# Altium PCB Street_light_driver_90w.PcbDoc
Units mm, origin at the board's own origin, x right, y up, seen from the top; angles counter-clockwise.
Board outline 55.01 x 124 mm, 2 copper layers (Top Layer, Bottom Layer); 52 components, 24 nets, 135 pads, 0 vias.
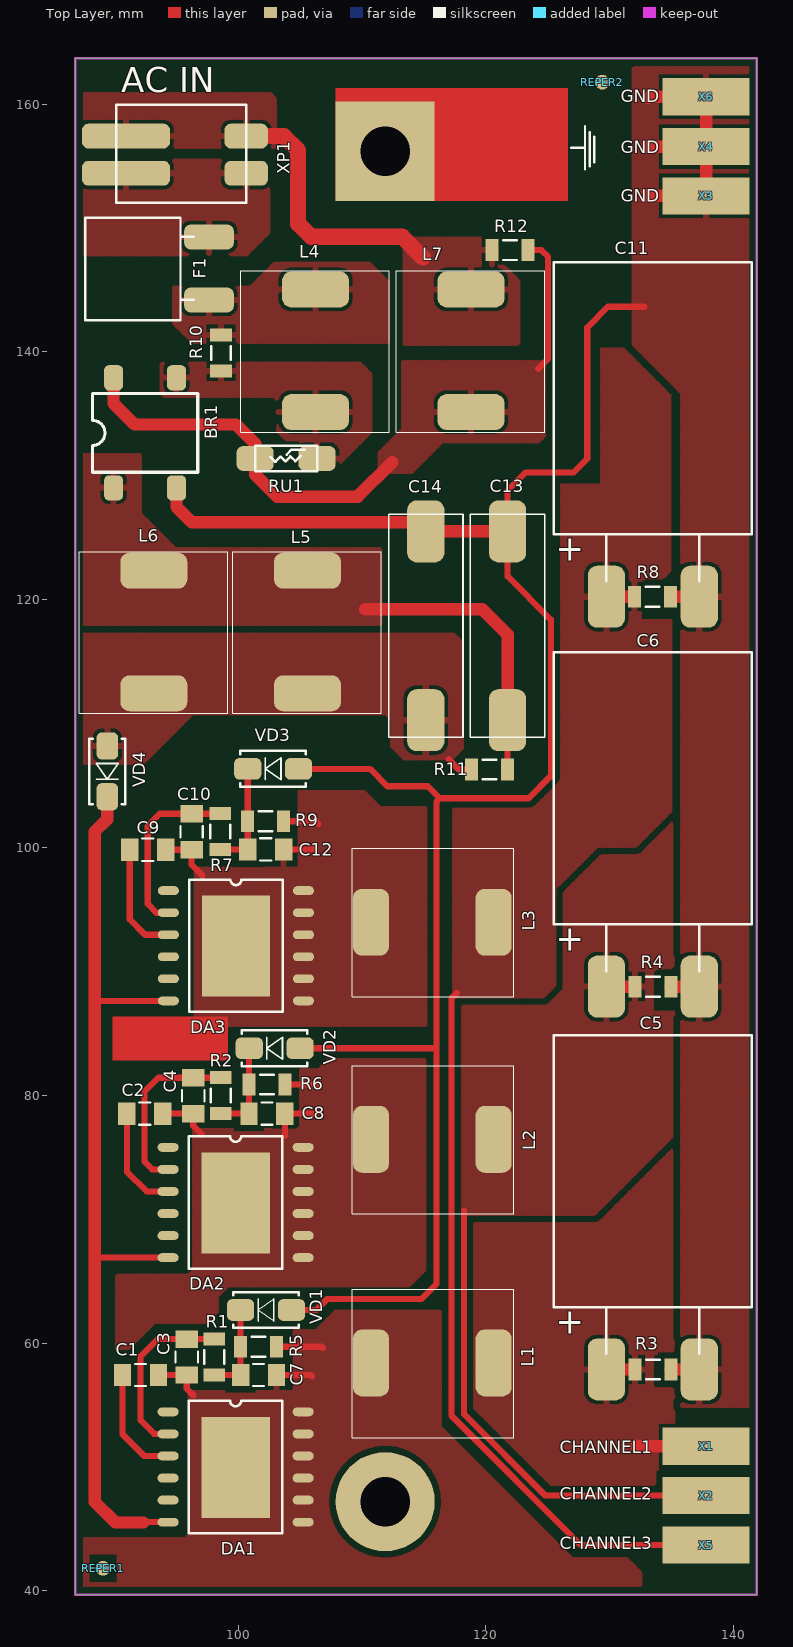
[diagram p0: Top Layer view]
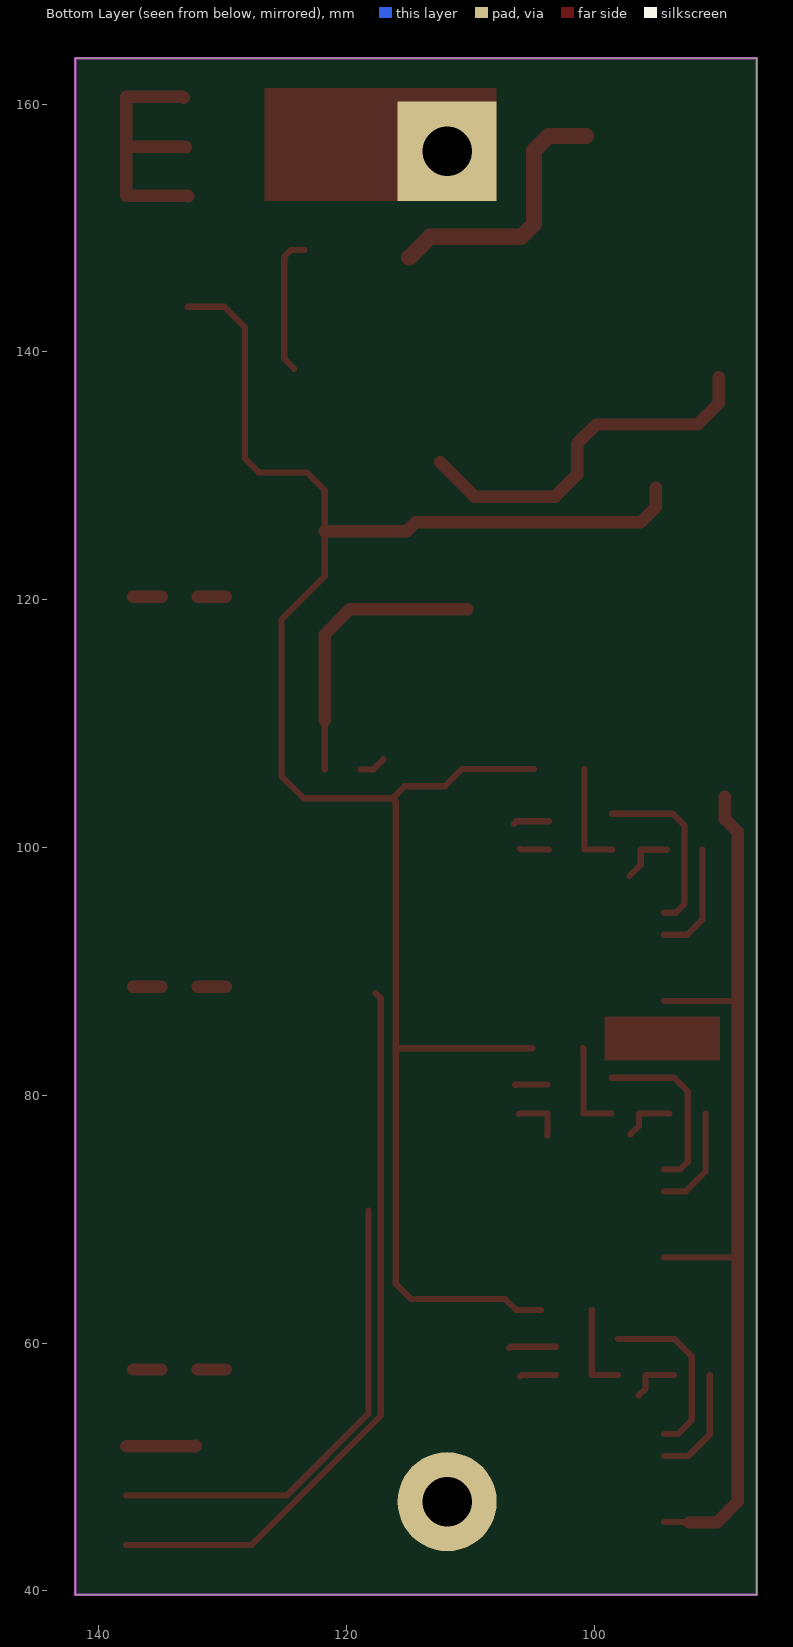
[diagram p1: Bottom Layer view, seen from below]

## Layer stack, top to bottom
Top Solder: solder mask 0.0102, Solder Resist, Dk 3.5
Top Layer: signal copper 0.0356
Dielectric 1: dielectric 0.32, FR-4, Dk 4.8
Bottom Layer: signal copper 0.0356
Bottom Solder: solder mask 0.0102, Solder Resist, Dk 3.5

## Board outline
86.868,39.703 86.868,163.703 141.875,163.703 141.875,39.703

## Design rules (kind name [scope] priority, off if disabled: settings)
Clearance [All] p1: gap=0.5
ComponentClearance [All] p1: gap=0.2 collisioncheckmode=3 verticalgap=2540 showdistances=FALSE
PolygonConnect PolygonConnect_1 [InComponent('DA1') AND InNet('NetC1_1') OR InComponent('DA2') AND InNet('NetC2_1') OR  InComponent('DA3') AND InNet('NetC9_1') OR InComponent('L1') OR InComponent('L2') OR InComponent('L3') OR InComponent('L5') OR InComponent('L6')] p1: connectstyle=Direct reliefconductorwidth=0.254 reliefentries=4 polygonreliefangle="90 Angle" airgapwidth=0.254
PolygonConnect [All] p2: connectstyle=Relief reliefconductorwidth=0.5 reliefentries=4 polygonreliefangle="90 Angle" airgapwidth=0.3
RoutingVias [All] p1: holewidth=0.711 width=1.27 viastyle="Through Hole" minholewidth=0.711 minwidth=1.27 maxholewidth=0.711 maxwidth=1.27
SolderMaskExpansion [All] p1: expansion=0.102
Width [All] p1: maxlimit=3 minlimit=0.2 preferedwidth=0.5
29 further rules are at their usual default settings.

## Classes and differential pairs
component class DriverIC: C1 C2 C3 C4 C5 C6 C7 C8 C9 C10 C11 C12 DA1 DA2 DA3 L1 L2 L3 R1 R2 R3 R4 R5 R6 R7 R8 R9 VD1 VD2 VD3 X1 X2 X3 X4 X5 X6
component class Input_AC: BR1 C13 C14 F1 L4 L5 L6 L7 R10 R11 R12 REPER1 REPER2 RU1 VD4 XP1

## Components (designator, comment, footprint, x,y, rotation, side; value= is the part's Value field where it differs from the comment)
BR1 "DF10S" SDIP 89.95,129.025 r180 top
C1 "10uF" CC1206 92.125,57.425 r180 top
C2 "10uF" CC1206 92.475,78.525 r180 top
C3 "1uF" CC1206 95.85,58.875 r270 top
C4 "1uF" CC1206 96.375,79.975 r270 top
C5 "220uFx100V" CAP_16x22_2 133.575,57.75 r0 top
C6 "220uFx100V" CAP_16x22_2 133.575,88.65 r0 top
C7 "10uF" CC1206 101.65,57.425 r0 top
C8 "10uF" CC1206 102.325,78.525 r0 top
C9 "10uF" CC1206 92.7,99.825 r180 top
C10 "1uF" CC1206 96.25,101.275 r270 top
C11 "220uFx100V" CAP_16x22_2 133.575,120.125 r0 top
C12 "10uF" CC1206 102.225,99.85 r0 top
C13 "100nFx630V" CAP_630V_SMD 121.675,118.1 r270 top
C14 "100nFx630V" CAP_630V_SMD 115.075,118.1 r270 top
DA1 "LNK460KG" eSOP-12 100.025,49.9 r0 top
DA2 "LNK460KG" eSOP-12 100.025,71.25 r0 top
DA3 "LNK460KG" eSOP-12 100.05,91.975 r0 top
F1 "Belfuse_3A" "Fuse Belfuse" 97.675,146.65 r90 top
L1 "CDRH129HF-331MC" IND_CDRH129 116.3,58.55 r270 top
L2 "CDRH129HF-331MC" IND_CDRH129 116.3,76.6 r270 top
L3 "CDRH129HF-331MC" IND_CDRH129 116.3,94.125 r270 top
L4 "CDRH129HF-102MC" IND_CDRH129 106.4,139.475 r180 top
L5 "CDRH129HF-102MC" IND_CDRH129 105.75,116.775 r180 top
L6 "CDRH129HF-102MC" IND_CDRH129 93.35,116.775 r180 top
L7 "CDRH129HF-102MC" IND_CDRH129 118.95,139.475 r180 top
R1 "3k3" RC1206 98.075,58.875 r90 top
R2 "3k3" RC1206 98.6,79.975 r90 top
R3 "100k" RC1206 133.475,57.875 r0 top
R4 "100k" RC1206 133.475,88.775 r0 top
R5 "1E2" RC1206 101.65,59.7 r0 top
R6 "1E2" RC1206 102.325,80.875 r0 top
R7 "3k3" RC1206 98.55,101.3 r90 top
R8 "100k" RC1206 133.45,120.25 r0 top
R9 "1E2" RC1206 102.225,102.125 r0 top
R10 "3k3" RC1206 98.625,139.925 r270 top
R11 "3k3" RC1206 120.3,106.3 r180 top
R12 "3k3" RC1206 121.95,148.225 r0 top
REPER1 "REPER1.2" REPER1.2 89.1,41.825 r90 top
REPER2 "REPER1.2" REPER1.2 129.4,161.775 r90 top
RU1 "KLS6-07D" Varistor_7mm_SMD 103.75,131.325 r90 top
VD1 "ES1J" SMA 102.25,62.675 r180 top
VD2 "ES1J" SMA 102.95,83.8 r180 top
VD3 "ES1J" SMA 102.825,106.35 r180 top
VD4 "ES1J" SMA 89.45,106.15 r270 top
X1 "PIN_7x3mm_SMD" PIN_7x3mm_SMD 137.775,51.675 r180 top
X2 "PIN_7x3mm_SMD" PIN_7x3mm_SMD 137.775,47.7 r180 top
X3 "PIN_7x3mm_SMD" PIN_7x3mm_SMD 137.775,152.6 r180 top
X4 "PIN_7x3mm_SMD" PIN_7x3mm_SMD 137.775,156.575 r180 top
X5 "PIN_7x3mm_SMD" PIN_7x3mm_SMD 137.775,43.7 r180 top
X6 "PIN_7x3mm_SMD" PIN_7x3mm_SMD 137.775,160.6 r180 top
XP1 "*" "Poke-In 2pin" 90.95,157.425 r0 top

## Footprints (in the part's own frame and the unit in brackets; to place one, negate y for a bottom-side part, rotate by r counter-clockwise, add the part's x,y. Pads: shape width x height; smd on the part's side, far side on the other; paste and mask are expansions set on the pad)
CAP_16x22_2 [mm]
  rrect50% 3x5 smd: 1(3.65,0.125) 2(-3.85,0.125)
  silkscreen extent -8.1,1.38 7.9,27.1
CAP_630V_SMD [mm]
  rrect50% 5x3 smd: 1(-7.42,0.075) 2(7.82,0.075)
  silkscreen extent -8.8,-2.92 9.2,3.08
CC1206 [mm]
  rect 1.4x1.8 smd paste-25.4: 1(-1.45,0) 2(1.45,0)
  silkscreen extent -0.45,-0.9 0.45,0.9
eSOP-12 [mm]
  oval 1.7x0.71 smd: 1(-5.675,4.55) 2(-5.675,2.77) 3(-5.675,0.99) 4(-5.675,-0.79) 5(-5.675,-2.57) 6(-5.675,-4.35) 7(5.225,-4.35) 8(5.225,-2.57) 9(5.225,-0.79) 10(5.225,0.99) 11(5.225,2.77) 12(5.225,4.55)
  rect 5.51x8.15 smd: 13(-0.225,0.075)
  silkscreen extent -3.99,-5.24 3.54,5.44, body extent -4,-5.25 3.52,5.45, height 2.3
"Fuse Belfuse" [mm]
  rrect50% 2x4 smd: 1(-2.45,0.025) 2(2.63,0.025)
  silkscreen extent -4.08,1.25 4.18,10.02
IND_CDRH129 [mm]
  rrect50% 5.4x2.9 smd: 1(0.15,-5.575) 2(0.15,4.325)
  silkscreen extent -5.8,-7.1 6.17,5.95
PIN_7x3mm_SMD [mm]
  rect 7x3 smd: 1(0,0)
"Poke-In 2pin" [mm]
  rrect50% 7.1x2 smd: 1(0,0) 2(0,-3)
  rrect50% 3.5x2 smd: 3(9.7,-3) 4(9.7,0)
  silkscreen extent -0.77,-5.38 9.72,2.53
RC1206 [mm]
  rect 1.05x1.75 smd paste-25.4: 1(-1.45,0) 2(1.45,0)
  silkscreen extent -0.55,-0.8 0.55,0.8
REPER1.2 [mm]
  round 1.2 smd paste-25.4 mask-25.4: 1(0,0)
  Top Layer pour cut-out: -1.2,-1.2 1.2,-1.2 1.2,1.2 -1.2,1.2
SDIP [mil]
  rrect50% 60x80 smd: 1(0,0) 2(-200,0) 3(-200,-350) 4(0,-350)
  silkscreen extent -268,-300 68,-50
SMA [mm]
  rrect50% 2.2x1.75 smd: 1(-2.05,0) 2(2.05,0)
  silkscreen extent -2.65,-1.45 2.65,1.45
Varistor_7mm_SMD [mm]
  rrect50% 2x3 smd: 1(0.075,2.375) 2(0.075,-2.625)
  silkscreen extent -0.95,-2.63 1.1,2.37

## Part data
C1 C2 C3 C4 C7 C8 C9 C10 C12: library part CC1206, "CC1206"
C5 C6 C11: library part CAP_16x22
C13 C14: library part Cap_HV
F1: library part "Fuse Belufse"
L1 L2 L3 L4 L5 L6 L7: library part CDRH129
R1 R2 R3 R4 R5 R6 R7 R8 R9 R10 R11 R12: library part RC1206, "RC1206"
VD1 VD2 VD3 VD4: library part SS14, "Schottky Rectifier"
XP1: library part "Poke-IN 2Pin"

## Free pads (board coordinates)
  round 8 hole 4: 0(111.868,47.203)
  rect 8x8 hole 4: 0(111.868,156.203)

## Nets (pads, with @x,y where several pads share a name; then routed paths per layer and width w, separated by ;. In a path a pad name is that pad's centre, name@x,y a point inside that pad or via, vN(x,y) a via of type N, cw(c..) or ccw(c..) an arc to the next point about the centre after c; other vN are vias at no path point)
GND: BR1.2 C5.1 C6.1 C11.1 C13.1 C14.1 R3.2 R4.2 R8.2 VD1.1 VD2.1 VD3.1 X3.1 X4.1 X6.1 | length 191.5
  Top Layer w0.5: VD1.1 106.3,62.675 107.175,63.55 114.775,63.55 116.025,64.8 116.025,83.775 ; VD3.1 110.65,106.35 112.05,104.95 115.3,104.95 116.275,103.975 ; VD2.1 116,83.8 116.025,83.775 ; 132.8,143.65 129.85,143.65 128.175,141.975 128.175,131.375 127.075,130.275 123.2,130.275 121.75,128.825 C13.1 121.75,121.9 125.25,118.4 125.25,105.775 123.45,103.975 116.275,103.975 ; 116.025,83.775 116.025,103.725 116.275,103.975
  Top Layer w1: BR1.2@95.025,129.06 95.025,127.5 96.275,126.25 114.42,126.25 C14.1 C13.1 ; 132.775,152.55 132.825,152.6 X3.1 X4.1 ; 132.95,156.525 133,156.575 X4.1 ; 133.125,160.525 133.2,160.6 X6.1 X4.1 ; R8.2 C11.1 ; R3.2 C5.1 ; R4.2 C6.1
NetBR1_1: BR1.1 C13.2 L5.1 L6.1 R11.1 | length 23.2
  Top Layer w0.5: R11.1 C13.2
  Top Layer w1: 110.25,119.25 119.7,119.25 121.75,117.2 C13.2
NetBR1_3: BR1.3 L4.2 R10.2 RU1.2
NetBR1_4: BR1.4 L7.2 R12.2 RU1.1 | length 41.6
  Top Layer w0.5: R12.2 124.475,148.225 125.025,147.675 125.025,139.45 124.225,138.65
  Top Layer w1: BR1.4@89.945,137.95 89.945,135.855 91.65,134.15 99.825,134.15 101.375,132.6 RU1.1 101.375,130.1 103.15,128.325 109.65,128.325 112.45,131.125
NetC1_1: C1.1 C3.2 C7.2 DA1.7 DA1.8 DA1.9 DA1.10 DA1.11 DA1.12 DA1.13 L1.1 R5.2 | length 10.9
  Top Layer w0.5: C1.1 C3.2 95.85,56.325 96.4,55.775 ; C7.2 105.875,57.425 105.975,57.325 ; R5.2 106.75,59.7 106.85,59.6
NetC1_2: C1.2 DA1.3 | length 9.2
  Top Layer w0.5: C1.2 90.675,52.625 92.41,50.89 DA1.3
NetC2_1: C2.1 C4.2 C8.2 DA2.7 DA2.8 DA2.9 DA2.10 DA2.11 DA2.12 DA2.13 L2.1 R6.2 | length 11.1
  Top Layer w0.5: C2.1 C4.2 96.375,77.55 97.075,76.85 ; R6.2 106.35,80.875 106.375,80.85 ; 103.8,76.75 103.775,76.775 C8.2 106.025,78.525 106.05,78.5
NetC2_2: C2.2 DA2.3 | length 8.7
  Top Layer w0.5: C2.2 91.025,73.825 92.61,72.24 DA2.3
NetC3_1: C3.1 DA1.2 R1.2 | length 14.4
  Top Layer w0.5: DA1.2 93.23,52.67 92.125,53.775 92.125,58.95 93.5,60.325 C3.1 R1.2
NetC4_1: C4.1 DA2.2 R2.2 | length 14.5
  Top Layer w0.5: DA2.2 93.055,74.02 92.45,74.625 92.45,80.325 93.55,81.425 C4.1 R2.2
NetC5_2: C5.2 L1.2 R3.1 X1.1 | length 7.9
  Top Layer w1: C5.2 R3.1 ; 132.15,51.725 132.2,51.675 X1.1
NetC6_2: C6.2 L2.2 R4.1 X2.1 | length 41
  Top Layer w0.5: 118.225,70.7 118.225,54.281 124.806,47.7 X2.1
  Top Layer w1: C6.2 R4.1
NetC7_1: C7.1 R1.1 R5.1 VD1.2 | length 7.4
  Top Layer w0.5: R1.1 C7.1 R5.1 VD1.2
NetC8_1: C8.1 R2.1 R6.1 VD2.2 | length 7.6
  Top Layer w0.5: R2.1 C8.1 R6.1 100.875,83.775 VD2.2
NetC9_1: C9.1 C10.2 C12.2 DA3.7 DA3.8 DA3.9 DA3.10 DA3.11 DA3.12 DA3.13 L3.1 R9.2 | length 9.8
  Top Layer w0.5: C9.1 C10.2 96.25,98.6 97.125,97.725 ; C12.2 105.95,99.85 106,99.9 ; R9.2 106.275,102.125 106.5,101.9
NetC9_2: C9.2 DA3.3 | length 9.3
  Top Layer w0.5: C9.2 91.25,94.2 92.485,92.965 DA3.3
NetC10_1: C10.1 DA3.2 R7.2 | length 14.5
  Top Layer w0.5: DA3.2 93.405,94.745 92.7,95.45 92.7,101.75 93.675,102.725 C10.1 98.525,102.725 R7.2
NetC11_2: C11.2 L3.2 R8.1 X5.1 | length 61.4
  Top Layer w0.5: 117.65,88.25 117.225,87.825 117.225,54.15 127.675,43.7 X5.1
  Top Layer w1: C11.2 R8.1
NetC12_1: C12.1 R7.1 R9.1 VD3.2 | length 8.7
  Top Layer w0.5: R7.1 C12.1 R9.1 VD3.2
NetC14_2: C14.2 L5.2 L6.2 R11.2 VD4.1 | length 2.2
  Top Layer w0.5: 117,107.125 117.825,106.3 R11.2
NetDA1_6: DA1.6 DA2.6 DA3.6 VD4.2 | length 75.9
  Top Layer w0.5: 88.425,66.9 DA2.6 ; 88.425,87.45 88.6,87.625 DA3.6 ; 92.35,45.525 92.375,45.55 DA1.6
  Top Layer w1: VD4.2 89.45,102.3 88.425,101.275 88.425,87.45 88.425,66.9 88.425,47.2 90.1,45.525 92.35,45.525
NetF1_1: F1.1 L4.1 R10.1
NetF1_2: F1.2 XP1.3
NetL7_1: L7.1 R12.1 XP1.4 | length 21.8
  Top Layer w1.3: XP1.4 103.7,157.425 104.85,156.275 104.85,150.35 105.9,149.3 113.25,149.3 114.925,147.625
pads on no net: DA1.1 DA1.4 DA1.5 DA2.1 DA2.4 DA2.5 DA3.1 DA3.4 DA3.5 REPER1.1 REPER2.1 XP1.1 XP1.2

## Polygon pours and split planes (outlines as drawn)
NetC14_2 on Top Layer "NETC14_2_L01_P020" (hatched 90Degree grid 0.15 track 0.2, remove dead copper, pour order 20): 86.868,117.25 90.725,117.25 117.425,117.25 118.15,116.525 118.15,108.9 118.15,108.025 117.25,107.125 113.85,107.125 113.375,107.125 112.375,108.125 112.375,109.7 112.375,110.3 111.925,110.75 98.2,110.75 96.325,110.75 94,108.425 92.35,106.775 86.868,106.775
NetBR1_1 on Top Layer "NETBR1_1_L01_P018" (hatched 90Degree grid 0.15 track 0.2, remove dead copper, pour order 18): 86.868,131.75 92.125,131.75 92.125,127.825 92.125,126.975 92.925,126.175 94.95,124.15 97.8,124.15 111.5,124.15 111.55,124.1 111.55,118 86.868,118
NetBR1_4 on Top Layer "NETBR1_4_L01_P016" (hatched 90Degree grid 0.15 track 0.2, remove dead copper, pour order 16): 113.25,139.25 122.5,139.25 124.75,139.25 124.75,133.825 124.75,133.2 124.575,133.025 124.25,132.7 118.65,132.7 116.475,132.7 115.7,131.925 114.025,130.25 111.35,130.25 111.35,131.875 112.4,132.925 113.25,133.775 113.25,135.25
NetBR1_3 on Top Layer "NETBR1_3_L01_P014" (hatched 90Degree grid 0.15 track 0.2, remove dead copper, pour order 14): 93.75,137.875 93.75,139.125 109.875,139.125 110.75,138.25 110.75,136.325 110.75,133.525 107.475,130.25 105.375,130.25 105,130.25 105,132.875 103.875,132.875 103.15,133.6 103.15,136.1 102.85,136.4 101.025,136.4 94,136.4 93.75,136.65
NetL7_1 on Top Layer "NETL7_1_L01_P012" (hatched 90Degree grid 0.15 track 0.2, remove dead copper, pour order 12): 113.375,140.6 113.375,146.3 113.375,148.575 114.025,149.225 117.125,149.225 120.975,149.225 121.175,149.025 121.375,148.825 121.375,147.05 121.725,146.7 122.675,145.75 122.675,140.6
NetL7_1 on Top Layer "NETL7_1_L01_P008" (hatched 90Degree grid 0.15 track 0.2, remove dead copper, pour order 8): 86.868,156.5 97.3,156.5 103.025,156.5 103.025,160.05 103.025,160.475 102.625,160.875 92.9,160.875 86.893,160.875 86.868,160.875 86.868,160.85
NetF1_2 on Top Layer "NETF1_2_L01_P006" (hatched 90Degree grid 0.15 track 0.2, remove dead copper, pour order 6): 86.868,155.5 102.525,155.5 102.525,150.225 102.525,149.625 100.725,147.825 96.35,147.825 86.868,147.825
NetF1_1 on Top Layer "NETF1_1_L01_P002" (hatched 90Degree grid 0.15 track 0.2, remove dead copper, pour order 2): 96.075,145.25 100.075,145.25 100.975,145.25 102.625,146.9 102.937,147.212 107.1,147.212 110.588,147.213 111.75,146.05 112.175,145.625 112.175,140.725 103.85,140.725 101.325,140.725 100.85,140.725 98.025,140.725 96.35,140.725 94.775,142.3 94.775,145.25
GND on Top Layer "GND_L01_P000" (hatched 90Degree grid 0.15 track 0.2, remove dead copper, pour order 0): 131.875,163.703 131.85,163.678 131.85,156.25 131.85,140.6 135.775,136.675 135.75,136.65 135.75,121 135.75,54.875 141.875,54.875 141.875,163.703
NetC9_1 on Top Layer "NETC9_1_L01_P022" (hatched 90Degree grid 0.15 track 0.2, remove dead copper, pour order 22): 96.5,88.125 96.5,98.375 100.825,98.375 104.875,98.375 104.9,98.4 104.9,104.55 110.175,104.55 111.475,103.25 115.25,103.25 115.25,86.875 115.25,86.25 115.25,85.625 112,85.625 104.25,85.625 96.5,85.625
NetC2_1 on Top Layer "NETC2_1_L01_P026" (hatched 90Degree grid 0.15 track 0.2, remove dead copper, pour order 26): 96.375,75.25 96.375,77.25 98.625,77.25 104.75,77.25 105,77.5 105,82.125 106.5,82.125 106.925,82.55 107.3,82.925 108.275,82.925 115.125,82.925 115.125,81.975 115.125,72.95 115.125,68.925 115.125,65.9 114.6,65.375 113.8,64.575 104.6,64.575 99.175,64.575 98.55,63.95 98.375,63.775 98.375,62.8 98.375,62.525 97.8,61.95 97.5,61.65 95.425,61.65 93.275,61.65 92.075,60.45 91.15,59.525 90.175,59.525 90.175,65.5 95.5,65.5 95.975,65.5 96.375,65.9
NetC1_1 on Top Layer "NETC1_1_L01_P028" (hatched 90Degree grid 0.15 track 0.2, remove dead copper, pour order 28): 96.025,51.375 96.025,54.7 96.025,56.125 96.05,56.1 97.8,56.1 104.5,56.1 104.5,59.725 104.5,61.025 105.975,61.025 106.275,61.025 107.65,62.4 107.85,62.6 111.65,62.6 116.35,62.6 116.35,60.2 116.35,53.25 124.9,44.7 126.95,42.65 128.975,42.65 131.375,42.65 132.2,41.825 132.525,41.5 132.525,39.703 86.868,39.703 86.868,44.25 95.7,44.25 96.025,44.575
NetC11_2 on Top Layer "NETC11_2_L01_P030" (hatched 90Degree grid 0.15 track 0.2, remove dead copper, pour order 30): 117.375,93.975 117.375,103.25 123.825,103.25 126.075,105.5 126.075,111.875 126.075,129.3 129.325,129.3 129.325,135.275 129.325,140.25 131.15,140.25 131.125,140.25 132.05,139.325 134.875,136.5 134.875,134.7 134.875,123.875 134.875,122.6 134.875,122.325 134.575,122.025 134.3,121.75 133.55,121.75 132.85,121.75 132.55,121.45 132.5,121.4 132.5,118.35 134.95,118.35 134.95,112.05 134.95,102.925 132.8,100.775 132.1,100.075 131.15,100.075 129.025,100.075 127.175,98.225 125.6,96.65 125.6,92.275 125.6,88.85 124.75,88 124.675,87.925 122.1,87.925 117.375,87.925
NetC6_2 on Top Layer "NETC6_2_L01_P032" (hatched 90Degree grid 0.15 track 0.2, remove dead copper, pour order 32): 117.925,77.025 117.925,81.625 117.925,87.35 118.9,87.35 119.175,87.35 119.475,87.35 125,87.35 125.975,88.325 126.1,88.45 126.1,94.275 126.1,96.375 127.525,97.8 129.325,99.6 130.9,99.6 132.4,99.6 133.6,100.8 135.275,102.475 135.275,90.6 135.1,90.425 134.9,90.225 134.325,90.225 133.75,90.225 133.5,89.975 133.475,89.95 133.475,86.75 135.275,86.75 135.275,76.875 129.775,71.375 128.775,70.375 117.925,70.375
NetC5_2 on Top Layer "NETC5_2_L01_P034" (hatched 90Degree grid 0.15 track 0.2, remove dead copper, pour order 34): 119,58.5 119,69.875 124.7,69.875 128.85,69.875 133.3,74.325 135.425,76.45 135.425,73.25 135.425,69.225 135.425,59.525 135.15,59.25 135.05,59.15 133.8,59.15 133.65,59.15 133.45,58.95 133.45,56.55 133.625,56.375 134.925,56.375 135.2,56.375 135.2,54.05 135.2,53.575 135.15,53.525 133.95,53.525 133.875,53.45 133.875,52.575 133.875,48.875 133.55,48.55 133.475,48.475 132.025,48.475 125.35,48.475 125.05,48.775 119,54.825 119,57.85

## Keep-outs
Keep-Out Layer:
  the board outline again, w0.2

## Other copper
Top Layer:
  rectangle: 107.875,152.2 126.625,161.3
  rectangle net NetC9_1: 89.85,82.8 99.175,86.375

## Silkscreen, mask and mechanical layers (free items; w line width, h text height)
Top Overlay:
  lines w0.2: 126.9,156.475 127.975,156.475 ; 128,154.75 128,158.225 ; 128.375,155 128.375,157.75 ; 128.75,155.3 128.75,157.375
  text "AC IN" at 90.575,160.95 h2
  text "GND" at 130.9,160.15 h1
  text "GND" at 130.9,156.025 h1
  text "GND" at 130.9,152.125 h1
  text "CHANNEL1" at 125.95,51.1 h1
  text "CHANNEL2" at 125.95,47.35 h1
  text "CHANNEL3" at 125.95,43.35 h1
Top Solder:
  rectangle: 107.725,152.1 126.75,161.425
Mechanical 2:
  circle w0.2: c111.868,156.203 r5.003
  circle w0.2: c111.868,156.203 r1.987
  circle w0.2: c111.868,47.203 r1.989
  circle w0.2: c111.868,47.203 r3.993
  lines w0.1: 114.2,156.125 118.35,156.125 121.375,159.15 121.375,164.475
  text "4mm" at 119.125,165.75 h4

## Dimensions
111.868,47.203 to 86.868,39.703 on Mechanical 2
111.868,156.203 to 86.868,163.703 on Mechanical 2
111.868,47.203 to 86.868,39.703 on Mechanical 2
111.868,156.203 to 86.868,163.703 on Mechanical 2
141.875,163.703 to 141.875,39.703 on Mechanical 2
141.875,163.703 to 86.868,163.703 on Mechanical 2

## Text inside footprints (layer, text, board x,y; h text height)
C5: Top Overlay "+" at 125.65,60.775 h2
C6: Top Overlay "+" at 125.65,91.675 h2
C11: Top Overlay "+" at 125.65,123.15 h2